# Altium PCB DSP6748_F.PcbDoc (part 12 of 16)
Units mil, origin at the board's own origin, x right, y up, seen from the top; angles counter-clockwise.
Board outline 8188.98 x 4055.12 mil, 4 copper layers (Top Layer, GND, VCC, Bottom Layer); 409 components, 262 nets, 1424 pads, 350 vias.
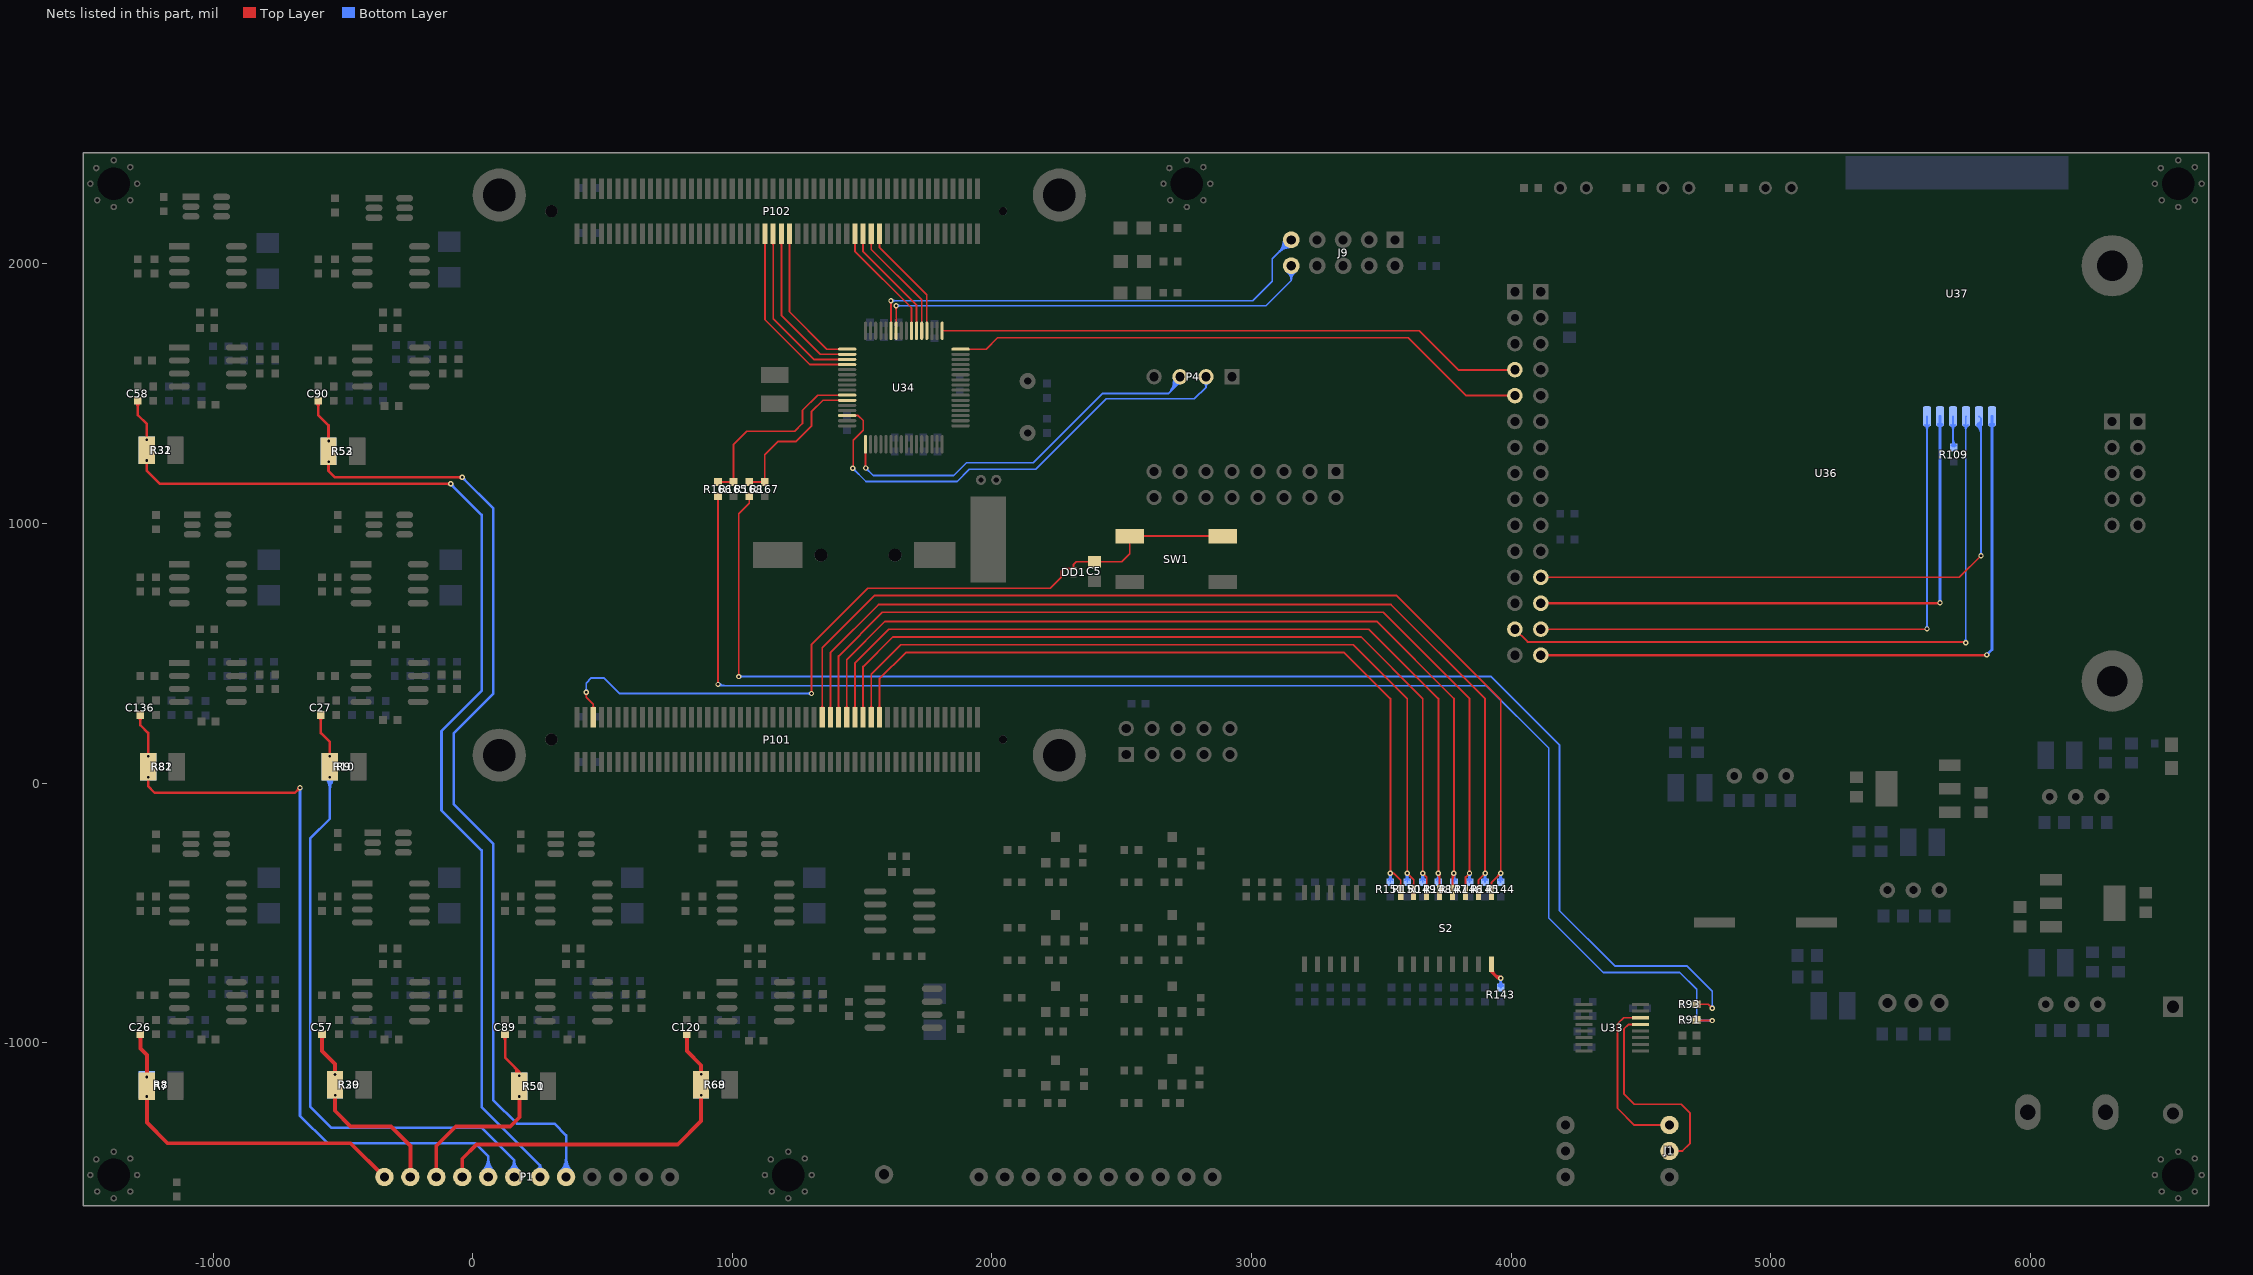
[diagram p14: the nets of this part, all layers, seen from the top]

## Via types
v1: diameter 21, hole 10, Top Layer to Bottom Layer, 244 vias
v2: diameter 20, hole 10, Top Layer to Bottom Layer, 84 vias
v3: diameter 32, hole 16, Top Layer to Bottom Layer, 11 vias
v4: diameter 24, hole 12, Top Layer to Bottom Layer, 7 vias
v5: diameter 39.37, hole 19.68, Top Layer to Bottom Layer, 3 vias
v6: diameter 30, hole 15, Top Layer to Bottom Layer, 1 vias

## Nets (pads, with @x,y where several pads share a name; then routed paths per layer and width w, separated by ;. In a path a pad name is that pad's centre, name@x,y a point inside that pad or via, vN(x,y) a via of type N, cw(c..) or ccw(c..) an arc to the next point about the centre after c; other vN are vias at no path point) (continued)
NetR143_2: R143.2 S2.8 | length 579.7
  Top Layer w10: S2.8@3924.81,-697.48 3924.81,-727.48 ; v1(3959.81,-752.48) 3949.81,-752.48 3924.81,-727.48 ; S2.8@3921.72,-720.89 cw(c3916.25,-727.48) 3924.81,-727.48 ; S2.8@3921.72,-720.89 cw(c3916.25,-727.48) 3924.81,-727.48 ; S2.8@3921.72,-720.89 cw(c3916.25,-727.48) 3924.81,-727.48 ; S2.8@3921.72,-720.89 cw(c3916.25,-727.48) 3924.81,-727.48 ; S2.8@3921.72,-720.89 cw(c3916.25,-727.48) 3924.81,-727.48 ; 3924.81,-727.48 cw(c3933.37,-727.48) S2.8@3927.9,-720.89 ; 3924.81,-727.48 cw(c3933.37,-727.48) S2.8@3927.9,-720.89 ; 3924.81,-727.48 cw(c3933.37,-727.48) S2.8@3927.9,-720.89 ; 3924.81,-727.48 cw(c3933.37,-727.48) S2.8@3927.9,-720.89 ; 3924.81,-727.48 cw(c3933.37,-727.48) S2.8@3927.9,-720.89 ; S2.8@3929.65,-717.17 ccw(c3966.25,-717.17) 3940.37,-743.04 ; S2.8@3929.65,-717.17 ccw(c3966.25,-717.17) 3940.37,-743.04 ; S2.8@3929.65,-717.17 ccw(c3966.25,-717.17) 3940.37,-743.04 ; 3933.35,-736.02 ccw(c3959.81,-709.56) v1@3959.81,-746.98 ; 3933.35,-736.02 ccw(c3959.81,-709.56) v1@3959.81,-746.98 ; 3933.35,-736.02 ccw(c3959.81,-709.56) v1@3959.81,-746.98 ; S2.8@3922.39,-721.36 cw(c3908.56,-745.31) 3935.28,-738.15 ccw(c3908.56,-745.31) S2.8@3922.39,-721.36
  Bottom Layer w10: R143.2@3959.81,-787.48 v1(3959.81,-752.48) ; R143.2@3952.74,-780.41 ccw(c3935.67,-763.34) 3959.81,-763.34 ; R143.2@3952.74,-780.41 ccw(c3935.67,-763.34) 3959.81,-763.34 ; R143.2@3952.74,-780.41 ccw(c3935.67,-763.34) 3959.81,-763.34 ; v1@3955.92,-756.37 cw(c3946.53,-765.76) 3959.81,-765.76 ; v1@3955.92,-756.37 cw(c3946.53,-765.76) 3959.81,-765.76 ; v1@3955.92,-756.37 cw(c3946.53,-765.76) 3959.81,-765.76 ; 3959.81,-765.76 cw(c3973.09,-765.76) v1@3963.7,-756.37 ; 3959.81,-765.76 cw(c3973.09,-765.76) v1@3963.7,-756.37 ; 3959.81,-765.76 cw(c3973.09,-765.76) v1@3963.7,-756.37 ; 3959.81,-763.34 ccw(c3983.95,-763.34) R143.2@3966.88,-780.41 ; 3959.81,-763.34 ccw(c3983.95,-763.34) R143.2@3966.88,-780.41 ; 3959.81,-763.34 ccw(c3983.95,-763.34) R143.2@3966.88,-780.41
NUM0: P101.76 R151.2 S2.16 | length 3497
  Top Layer w7: P101.76@1562.44,288.14 ccw(c1551.61,298.97) 1566.93,298.97 ccw(c1582.25,298.97) P101.76@1571.42,288.14 ; P101.76@1566.93,254.13 1566.93,401.3 1668.15,502.52 3357.48,502.52 3535,325 v1@3535,-347.48 ; v1(3534.81,-347.48) 3547.81,-347.48 ; v1@3540.65,-351.33 cw(c3547.81,-356.05) 3547.81,-347.48 ; v1@3540.65,-343.63 ccw(c3547.81,-338.91) 3547.81,-347.48 ; S2.16@3574.81,-421.89 3574.81,-374.48 3547.81,-347.48 ; S2.16@3570.32,-397.72 ccw(c3559.5,-386.89) 3574.81,-386.89 ; S2.16@3570.32,-397.72 ccw(c3559.5,-386.89) 3574.81,-386.89 ; S2.16@3570.32,-397.72 ccw(c3559.5,-386.89) 3574.81,-386.89 ; 3574.81,-386.89 ccw(c3590.12,-386.89) S2.16@3579.29,-397.72 ; 3574.81,-386.89 ccw(c3590.12,-386.89) S2.16@3579.29,-397.72 ; 3574.81,-386.89 ccw(c3590.12,-386.89) S2.16@3579.29,-397.72
  Bottom Layer w7: R151.2@3534.81,-382.48 v1(3534.81,-347.48) ; R151.2@3526.68,-374.35 ccw(c3507.05,-354.72) v1@3534.81,-354.72 ; R151.2@3526.68,-374.35 ccw(c3507.05,-354.72) v1@3534.81,-354.72 ; R151.2@3526.68,-374.35 ccw(c3507.05,-354.72) v1@3534.81,-354.72 ; v1@3529.23,-351.71 cw(c3516.54,-361.34) 3531.93,-365.46 ; v1@3529.23,-351.71 cw(c3516.54,-361.34) 3531.93,-365.46 ; v1@3529.23,-351.71 cw(c3516.54,-361.34) 3531.93,-365.46 ; v1@3529.86,-352.43 cw(c3517.91,-364.38) 3534.81,-364.38 ; v1@3529.86,-352.43 cw(c3517.91,-364.38) 3534.81,-364.38 ; v1@3529.86,-352.43 cw(c3517.91,-364.38) 3534.81,-364.38 ; v1@3531.31,-353.54 cw(c3526.06,-362.64) 3536.2,-359.92 ; v1@3531.31,-353.54 cw(c3526.06,-362.64) 3536.2,-359.92 ; v1@3531.31,-353.54 cw(c3526.06,-362.64) 3536.2,-359.92 ; 3533.42,-359.92 cw(c3543.56,-362.64) v1@3538.31,-353.54 ; 3533.42,-359.92 cw(c3543.56,-362.64) v1@3538.31,-353.54 ; 3533.42,-359.92 cw(c3543.56,-362.64) v1@3538.31,-353.54 ; 3534.81,-364.38 cw(c3551.71,-364.38) v1@3539.76,-352.43 ; 3534.81,-364.38 cw(c3551.71,-364.38) v1@3539.76,-352.43 ; 3534.81,-364.38 cw(c3551.71,-364.38) v1@3539.76,-352.43 ; v1@3534.81,-354.72 ccw(c3562.57,-354.72) R151.2@3542.94,-374.35 ; v1@3534.81,-354.72 ccw(c3562.57,-354.72) R151.2@3542.94,-374.35 ; v1@3534.81,-354.72 ccw(c3562.57,-354.72) R151.2@3542.94,-374.35 ; 3537.69,-365.46 cw(c3553.08,-361.34) v1@3540.39,-351.71 ; 3537.69,-365.46 cw(c3553.08,-361.34) v1@3540.39,-351.71 ; 3537.69,-365.46 cw(c3553.08,-361.34) v1@3540.39,-351.71
NUM1: P101.74 R150.2 S2.15 | length 3598.4
  Top Layer w7: P101.74@1530.94,288.14 ccw(c1520.11,298.97) 1535.43,298.97 ccw(c1550.75,298.97) P101.74@1539.92,288.14 ; P101.74@1535.43,254.13 1535.43,419.8 1648.15,532.52 3392.48,532.52 3600,325 v1@3600,-347.48 ; v1(3599.81,-347.48) 3624.81,-372.48 S2.15@3624.81,-421.89 ; S2.15@3620.32,-397.72 ccw(c3609.5,-386.89) 3624.81,-386.89 ; S2.15@3620.32,-397.72 ccw(c3609.5,-386.89) 3624.81,-386.89 ; S2.15@3620.32,-397.72 ccw(c3609.5,-386.89) 3624.81,-386.89 ; 3624.81,-386.89 ccw(c3640.12,-386.89) S2.15@3629.29,-397.72 ; 3624.81,-386.89 ccw(c3640.12,-386.89) S2.15@3629.29,-397.72 ; 3624.81,-386.89 ccw(c3640.12,-386.89) S2.15@3629.29,-397.72
  Bottom Layer w7: R150.2@3599.81,-382.48 v1(3599.81,-347.48) ; R150.2@3591.68,-374.35 ccw(c3572.05,-354.72) v1@3599.81,-354.72 ; R150.2@3591.68,-374.35 ccw(c3572.05,-354.72) v1@3599.81,-354.72 ; R150.2@3591.68,-374.35 ccw(c3572.05,-354.72) v1@3599.81,-354.72 ; v1@3594.23,-351.71 cw(c3581.54,-361.34) 3596.93,-365.46 ; v1@3594.23,-351.71 cw(c3581.54,-361.34) 3596.93,-365.46 ; v1@3594.23,-351.71 cw(c3581.54,-361.34) 3596.93,-365.46 ; v1@3594.86,-352.43 cw(c3582.91,-364.38) 3599.81,-364.38 ; v1@3594.86,-352.43 cw(c3582.91,-364.38) 3599.81,-364.38 ; v1@3594.86,-352.43 cw(c3582.91,-364.38) 3599.81,-364.38 ; v1@3596.31,-353.54 cw(c3591.06,-362.64) 3601.2,-359.92 ; v1@3596.31,-353.54 cw(c3591.06,-362.64) 3601.2,-359.92 ; v1@3596.31,-353.54 cw(c3591.06,-362.64) 3601.2,-359.92 ; 3598.42,-359.92 cw(c3608.56,-362.64) v1@3603.31,-353.54 ; 3598.42,-359.92 cw(c3608.56,-362.64) v1@3603.31,-353.54 ; 3598.42,-359.92 cw(c3608.56,-362.64) v1@3603.31,-353.54 ; 3599.81,-364.38 cw(c3616.71,-364.38) v1@3604.76,-352.43 ; 3599.81,-364.38 cw(c3616.71,-364.38) v1@3604.76,-352.43 ; 3599.81,-364.38 cw(c3616.71,-364.38) v1@3604.76,-352.43 ; v1@3599.81,-354.72 ccw(c3627.57,-354.72) R150.2@3607.94,-374.35 ; v1@3599.81,-354.72 ccw(c3627.57,-354.72) R150.2@3607.94,-374.35 ; v1@3599.81,-354.72 ccw(c3627.57,-354.72) R150.2@3607.94,-374.35 ; 3602.69,-365.46 cw(c3618.08,-361.34) v1@3605.39,-351.71 ; 3602.69,-365.46 cw(c3618.08,-361.34) v1@3605.39,-351.71 ; 3602.69,-365.46 cw(c3618.08,-361.34) v1@3605.39,-351.71
NUM2: P101.72 R149.2 S2.14 | length 3727.3
  Top Layer w7: P101.72@1499.45,288.14 ccw(c1488.62,298.97) 1503.94,298.97 ccw(c1519.26,298.97) P101.72@1508.43,288.14 ; P101.72@1503.94,254.13 1503.94,448.31 1618.15,562.52 3422.48,562.52 3660,325 v1@3660,-347.48 ; v1(3659.81,-347.48) 3674.81,-362.48 S2.14@3674.81,-421.89 ; S2.14@3670.32,-397.72 ccw(c3659.5,-386.89) 3674.81,-386.89 ; S2.14@3670.32,-397.72 ccw(c3659.5,-386.89) 3674.81,-386.89 ; S2.14@3670.32,-397.72 ccw(c3659.5,-386.89) 3674.81,-386.89 ; 3674.81,-386.89 ccw(c3690.12,-386.89) S2.14@3679.29,-397.72 ; 3674.81,-386.89 ccw(c3690.12,-386.89) S2.14@3679.29,-397.72 ; 3674.81,-386.89 ccw(c3690.12,-386.89) S2.14@3679.29,-397.72
  Bottom Layer w7: R149.2@3659.81,-382.48 v1(3659.81,-347.48) ; R149.2@3651.68,-374.35 ccw(c3632.05,-354.72) v1@3659.81,-354.72 ; R149.2@3651.68,-374.35 ccw(c3632.05,-354.72) v1@3659.81,-354.72 ; R149.2@3651.68,-374.35 ccw(c3632.05,-354.72) v1@3659.81,-354.72 ; v1@3654.23,-351.71 cw(c3641.54,-361.34) 3656.93,-365.46 ; v1@3654.23,-351.71 cw(c3641.54,-361.34) 3656.93,-365.46 ; v1@3654.23,-351.71 cw(c3641.54,-361.34) 3656.93,-365.46 ; v1@3654.86,-352.43 cw(c3642.91,-364.38) 3659.81,-364.38 ; v1@3654.86,-352.43 cw(c3642.91,-364.38) 3659.81,-364.38 ; v1@3654.86,-352.43 cw(c3642.91,-364.38) 3659.81,-364.38 ; v1@3656.31,-353.54 cw(c3651.06,-362.64) 3661.2,-359.92 ; v1@3656.31,-353.54 cw(c3651.06,-362.64) 3661.2,-359.92 ; v1@3656.31,-353.54 cw(c3651.06,-362.64) 3661.2,-359.92 ; 3658.42,-359.92 cw(c3668.56,-362.64) v1@3663.31,-353.54 ; 3658.42,-359.92 cw(c3668.56,-362.64) v1@3663.31,-353.54 ; 3658.42,-359.92 cw(c3668.56,-362.64) v1@3663.31,-353.54 ; 3659.81,-364.38 cw(c3676.71,-364.38) v1@3664.76,-352.43 ; 3659.81,-364.38 cw(c3676.71,-364.38) v1@3664.76,-352.43 ; 3659.81,-364.38 cw(c3676.71,-364.38) v1@3664.76,-352.43 ; v1@3659.81,-354.72 ccw(c3687.57,-354.72) R149.2@3667.94,-374.35 ; v1@3659.81,-354.72 ccw(c3687.57,-354.72) R149.2@3667.94,-374.35 ; v1@3659.81,-354.72 ccw(c3687.57,-354.72) R149.2@3667.94,-374.35 ; 3662.69,-365.46 cw(c3678.08,-361.34) v1@3665.39,-351.71 ; 3662.69,-365.46 cw(c3678.08,-361.34) v1@3665.39,-351.71 ; 3662.69,-365.46 cw(c3678.08,-361.34) v1@3665.39,-351.71
NUM3: P101.70 R148.2 S2.13 | length 3967.7
  Top Layer w7: P101.70@1467.95,288.14 ccw(c1457.12,298.97) 1472.44,298.97 ccw(c1487.76,298.97) P101.70@1476.93,288.14 ; P101.70@1472.44,254.13 1472.44,461.81 1603.15,592.52 3452.48,592.52 3720,325 v1@3720,-347.48 ; S2.13@3724.81,-421.89 3724.81,-352.48 v1(3719.81,-347.48) ; v1@3714.86,-352.43 cw(c3690.84,-376.45) 3724.81,-376.45 ; v1@3714.86,-352.43 cw(c3690.84,-376.45) 3724.81,-376.45 ; v1@3714.86,-352.43 cw(c3690.84,-376.45) 3724.81,-376.45 ; v1(3719.81,-347.48) cw(c3707.74,-359.55) 3724.81,-359.55 ; v1(3719.81,-347.48) cw(c3707.74,-359.55) 3724.81,-359.55 ; v1(3719.81,-347.48) cw(c3707.74,-359.55) 3724.81,-359.55 ; S2.13@3720.32,-397.72 ccw(c3709.5,-386.89) 3724.81,-386.89 ; S2.13@3720.32,-397.72 ccw(c3709.5,-386.89) 3724.81,-386.89 ; S2.13@3720.32,-397.72 ccw(c3709.5,-386.89) 3724.81,-386.89 ; 3724.81,-386.89 ccw(c3740.12,-386.89) S2.13@3729.29,-397.72 ; 3724.81,-386.89 ccw(c3740.12,-386.89) S2.13@3729.29,-397.72 ; 3724.81,-386.89 ccw(c3740.12,-386.89) S2.13@3729.29,-397.72
  Bottom Layer w7: R148.2@3719.81,-382.48 v1(3719.81,-347.48) ; R148.2@3711.68,-374.35 ccw(c3692.05,-354.72) v1@3719.81,-354.72 ; R148.2@3711.68,-374.35 ccw(c3692.05,-354.72) v1@3719.81,-354.72 ; R148.2@3711.68,-374.35 ccw(c3692.05,-354.72) v1@3719.81,-354.72 ; v1@3714.23,-351.71 cw(c3701.54,-361.34) 3716.93,-365.46 ; v1@3714.23,-351.71 cw(c3701.54,-361.34) 3716.93,-365.46 ; v1@3714.23,-351.71 cw(c3701.54,-361.34) 3716.93,-365.46 ; v1@3714.86,-352.43 cw(c3702.91,-364.38) 3719.81,-364.38 ; v1@3714.86,-352.43 cw(c3702.91,-364.38) 3719.81,-364.38 ; v1@3714.86,-352.43 cw(c3702.91,-364.38) 3719.81,-364.38 ; v1@3716.31,-353.54 cw(c3711.06,-362.64) 3721.2,-359.92 ; v1@3716.31,-353.54 cw(c3711.06,-362.64) 3721.2,-359.92 ; v1@3716.31,-353.54 cw(c3711.06,-362.64) 3721.2,-359.92 ; 3718.42,-359.92 cw(c3728.56,-362.64) v1@3723.31,-353.54 ; 3718.42,-359.92 cw(c3728.56,-362.64) v1@3723.31,-353.54 ; 3718.42,-359.92 cw(c3728.56,-362.64) v1@3723.31,-353.54 ; 3719.81,-364.38 cw(c3736.71,-364.38) v1@3724.76,-352.43 ; 3719.81,-364.38 cw(c3736.71,-364.38) v1@3724.76,-352.43 ; 3719.81,-364.38 cw(c3736.71,-364.38) v1@3724.76,-352.43 ; v1@3719.81,-354.72 ccw(c3747.57,-354.72) R148.2@3727.94,-374.35 ; v1@3719.81,-354.72 ccw(c3747.57,-354.72) R148.2@3727.94,-374.35 ; v1@3719.81,-354.72 ccw(c3747.57,-354.72) R148.2@3727.94,-374.35 ; 3722.69,-365.46 cw(c3738.08,-361.34) v1@3725.39,-351.71 ; 3722.69,-365.46 cw(c3738.08,-361.34) v1@3725.39,-351.71 ; 3722.69,-365.46 cw(c3738.08,-361.34) v1@3725.39,-351.71
NUM4: P101.68 R147.2 S2.12 | length 4091.9
  Top Layer w7: P101.68@1436.46,288.14 ccw(c1425.63,298.97) 1440.95,298.97 ccw(c1456.27,298.97) P101.68@1445.44,288.14 ; P101.68@1440.95,254.13 1440.95,475.32 1588.15,622.52 3482.48,622.52 3780,325 v1@3780,-347.48 ; S2.12@3774.81,-421.89 3774.81,-352.48 v1(3779.81,-347.48) ; S2.12@3770.32,-397.72 ccw(c3759.5,-386.89) 3774.81,-386.89 ; S2.12@3770.32,-397.72 ccw(c3759.5,-386.89) 3774.81,-386.89 ; S2.12@3770.32,-397.72 ccw(c3759.5,-386.89) 3774.81,-386.89 ; 3774.81,-386.89 ccw(c3790.12,-386.89) S2.12@3779.29,-397.72 ; 3774.81,-386.89 ccw(c3790.12,-386.89) S2.12@3779.29,-397.72 ; 3774.81,-386.89 ccw(c3790.12,-386.89) S2.12@3779.29,-397.72 ; 3774.81,-376.45 cw(c3808.78,-376.45) v1@3784.76,-352.43 ; 3774.81,-376.45 cw(c3808.78,-376.45) v1@3784.76,-352.43 ; 3774.81,-376.45 cw(c3808.78,-376.45) v1@3784.76,-352.43 ; 3774.81,-359.55 cw(c3791.88,-359.55) v1(3779.81,-347.48) ; 3774.81,-359.55 cw(c3791.88,-359.55) v1(3779.81,-347.48) ; 3774.81,-359.55 cw(c3791.88,-359.55) v1(3779.81,-347.48)
  Bottom Layer w7: R147.2@3779.81,-382.48 v1(3779.81,-347.48) ; R147.2@3771.68,-374.35 ccw(c3752.05,-354.72) v1@3779.81,-354.72 ; R147.2@3771.68,-374.35 ccw(c3752.05,-354.72) v1@3779.81,-354.72 ; R147.2@3771.68,-374.35 ccw(c3752.05,-354.72) v1@3779.81,-354.72 ; v1@3774.23,-351.71 cw(c3761.54,-361.34) 3776.93,-365.46 ; v1@3774.23,-351.71 cw(c3761.54,-361.34) 3776.93,-365.46 ; v1@3774.23,-351.71 cw(c3761.54,-361.34) 3776.93,-365.46 ; v1@3774.86,-352.43 cw(c3762.91,-364.38) 3779.81,-364.38 ; v1@3774.86,-352.43 cw(c3762.91,-364.38) 3779.81,-364.38 ; v1@3774.86,-352.43 cw(c3762.91,-364.38) 3779.81,-364.38 ; v1@3776.31,-353.54 cw(c3771.06,-362.64) 3781.2,-359.92 ; v1@3776.31,-353.54 cw(c3771.06,-362.64) 3781.2,-359.92 ; v1@3776.31,-353.54 cw(c3771.06,-362.64) 3781.2,-359.92 ; 3778.42,-359.92 cw(c3788.56,-362.64) v1@3783.31,-353.54 ; 3778.42,-359.92 cw(c3788.56,-362.64) v1@3783.31,-353.54 ; 3778.42,-359.92 cw(c3788.56,-362.64) v1@3783.31,-353.54 ; 3779.81,-364.38 cw(c3796.71,-364.38) v1@3784.76,-352.43 ; 3779.81,-364.38 cw(c3796.71,-364.38) v1@3784.76,-352.43 ; 3779.81,-364.38 cw(c3796.71,-364.38) v1@3784.76,-352.43 ; v1@3779.81,-354.72 ccw(c3807.57,-354.72) R147.2@3787.94,-374.35 ; v1@3779.81,-354.72 ccw(c3807.57,-354.72) R147.2@3787.94,-374.35 ; v1@3779.81,-354.72 ccw(c3807.57,-354.72) R147.2@3787.94,-374.35 ; 3782.69,-365.46 cw(c3798.08,-361.34) v1@3785.39,-351.71 ; 3782.69,-365.46 cw(c3798.08,-361.34) v1@3785.39,-351.71 ; 3782.69,-365.46 cw(c3798.08,-361.34) v1@3785.39,-351.71
NUM5: P101.66 R146.2 S2.11 | length 4104.2
  Top Layer w7: P101.66@1404.96,288.14 ccw(c1394.13,298.97) 1409.45,298.97 ccw(c1424.77,298.97) P101.66@1413.94,288.14 ; P101.66@1409.45,254.13 1409.45,488.82 1578.15,657.52 3507.48,657.52 3840,325 v1@3840,-347.48 ; S2.11@3824.81,-421.89 3824.81,-362.48 v1(3839.81,-347.48) ; S2.11@3820.32,-397.72 ccw(c3809.5,-386.89) 3824.81,-386.89 ; S2.11@3820.32,-397.72 ccw(c3809.5,-386.89) 3824.81,-386.89 ; S2.11@3820.32,-397.72 ccw(c3809.5,-386.89) 3824.81,-386.89 ; 3824.81,-386.89 ccw(c3840.12,-386.89) S2.11@3829.29,-397.72 ; 3824.81,-386.89 ccw(c3840.12,-386.89) S2.11@3829.29,-397.72 ; 3824.81,-386.89 ccw(c3840.12,-386.89) S2.11@3829.29,-397.72
  Bottom Layer w7: R146.2@3839.81,-382.48 v1(3839.81,-347.48) ; R146.2@3831.68,-374.35 ccw(c3812.05,-354.72) v1@3839.81,-354.72 ; R146.2@3831.68,-374.35 ccw(c3812.05,-354.72) v1@3839.81,-354.72 ; R146.2@3831.68,-374.35 ccw(c3812.05,-354.72) v1@3839.81,-354.72 ; v1@3834.23,-351.71 cw(c3821.54,-361.34) 3836.93,-365.46 ; v1@3834.23,-351.71 cw(c3821.54,-361.34) 3836.93,-365.46 ; v1@3834.23,-351.71 cw(c3821.54,-361.34) 3836.93,-365.46 ; v1@3834.86,-352.43 cw(c3822.91,-364.38) 3839.81,-364.38 ; v1@3834.86,-352.43 cw(c3822.91,-364.38) 3839.81,-364.38 ; v1@3834.86,-352.43 cw(c3822.91,-364.38) 3839.81,-364.38 ; v1@3836.31,-353.54 cw(c3831.06,-362.64) 3841.2,-359.92 ; v1@3836.31,-353.54 cw(c3831.06,-362.64) 3841.2,-359.92 ; v1@3836.31,-353.54 cw(c3831.06,-362.64) 3841.2,-359.92 ; 3838.42,-359.92 cw(c3848.56,-362.64) v1@3843.31,-353.54 ; 3838.42,-359.92 cw(c3848.56,-362.64) v1@3843.31,-353.54 ; 3838.42,-359.92 cw(c3848.56,-362.64) v1@3843.31,-353.54 ; 3839.81,-364.38 cw(c3856.71,-364.38) v1@3844.76,-352.43 ; 3839.81,-364.38 cw(c3856.71,-364.38) v1@3844.76,-352.43 ; 3839.81,-364.38 cw(c3856.71,-364.38) v1@3844.76,-352.43 ; v1@3839.81,-354.72 ccw(c3867.57,-354.72) R146.2@3847.94,-374.35 ; v1@3839.81,-354.72 ccw(c3867.57,-354.72) R146.2@3847.94,-374.35 ; v1@3839.81,-354.72 ccw(c3867.57,-354.72) R146.2@3847.94,-374.35 ; 3842.69,-365.46 cw(c3858.08,-361.34) v1@3845.39,-351.71 ; 3842.69,-365.46 cw(c3858.08,-361.34) v1@3845.39,-351.71 ; 3842.69,-365.46 cw(c3858.08,-361.34) v1@3845.39,-351.71
NUM6: P101.64 R145.2 S2.10 | length 4232.6
  Top Layer w7: P101.64@1373.46,288.14 ccw(c1362.63,298.97) 1377.95,298.97 ccw(c1393.27,298.97) P101.64@1382.44,288.14 ; P101.64@1377.95,254.13 1377.95,502.32 1563.15,687.52 3537.48,687.52 3900,325 v1@3900,-347.48 ; S2.10@3874.81,-421.89 3874.81,-372.48 v1(3899.81,-347.48) ; S2.10@3870.32,-397.72 ccw(c3859.5,-386.89) 3874.81,-386.89 ; S2.10@3870.32,-397.72 ccw(c3859.5,-386.89) 3874.81,-386.89 ; S2.10@3870.32,-397.72 ccw(c3859.5,-386.89) 3874.81,-386.89 ; 3874.81,-386.89 ccw(c3890.12,-386.89) S2.10@3879.29,-397.72 ; 3874.81,-386.89 ccw(c3890.12,-386.89) S2.10@3879.29,-397.72 ; 3874.81,-386.89 ccw(c3890.12,-386.89) S2.10@3879.29,-397.72
  Bottom Layer w7: R145.2@3899.81,-382.48 v1(3899.81,-347.48) ; R145.2@3891.68,-374.35 ccw(c3872.05,-354.72) v1@3899.81,-354.72 ; R145.2@3891.68,-374.35 ccw(c3872.05,-354.72) v1@3899.81,-354.72 ; R145.2@3891.68,-374.35 ccw(c3872.05,-354.72) v1@3899.81,-354.72 ; v1@3894.23,-351.71 cw(c3881.54,-361.34) 3896.93,-365.46 ; v1@3894.23,-351.71 cw(c3881.54,-361.34) 3896.93,-365.46 ; v1@3894.23,-351.71 cw(c3881.54,-361.34) 3896.93,-365.46 ; v1@3894.86,-352.43 cw(c3882.91,-364.38) 3899.81,-364.38 ; v1@3894.86,-352.43 cw(c3882.91,-364.38) 3899.81,-364.38 ; v1@3894.86,-352.43 cw(c3882.91,-364.38) 3899.81,-364.38 ; v1@3896.31,-353.54 cw(c3891.06,-362.64) 3901.2,-359.92 ; v1@3896.31,-353.54 cw(c3891.06,-362.64) 3901.2,-359.92 ; v1@3896.31,-353.54 cw(c3891.06,-362.64) 3901.2,-359.92 ; 3898.42,-359.92 cw(c3908.56,-362.64) v1@3903.31,-353.54 ; 3898.42,-359.92 cw(c3908.56,-362.64) v1@3903.31,-353.54 ; 3898.42,-359.92 cw(c3908.56,-362.64) v1@3903.31,-353.54 ; 3899.81,-364.38 cw(c3916.71,-364.38) v1@3904.76,-352.43 ; 3899.81,-364.38 cw(c3916.71,-364.38) v1@3904.76,-352.43 ; 3899.81,-364.38 cw(c3916.71,-364.38) v1@3904.76,-352.43 ; v1@3899.81,-354.72 ccw(c3927.57,-354.72) R145.2@3907.94,-374.35 ; v1@3899.81,-354.72 ccw(c3927.57,-354.72) R145.2@3907.94,-374.35 ; v1@3899.81,-354.72 ccw(c3927.57,-354.72) R145.2@3907.94,-374.35 ; 3902.69,-365.46 cw(c3918.08,-361.34) v1@3905.39,-351.71 ; 3902.69,-365.46 cw(c3918.08,-361.34) v1@3905.39,-351.71 ; 3902.69,-365.46 cw(c3918.08,-361.34) v1@3905.39,-351.71
NUM7: P101.62 R144.2 S2.9 | length 4499
  Top Layer w7: P101.62@1341.97,288.14 ccw(c1331.14,298.97) 1346.46,298.97 ccw(c1361.78,298.97) P101.62@1350.95,288.14 ; P101.62@1346.46,254.13 1346.46,520.83 1548.15,722.52 3557.48,722.52 3960,320 v1@3960,-347.48 ; S2.9@3924.81,-421.89 3924.81,-382.48 v1(3959.81,-347.48) ; S2.9@3920.32,-397.72 ccw(c3909.5,-386.89) 3924.81,-386.89 ; S2.9@3920.32,-397.72 ccw(c3909.5,-386.89) 3924.81,-386.89 ; S2.9@3920.32,-397.72 ccw(c3909.5,-386.89) 3924.81,-386.89 ; 3924.81,-386.89 ccw(c3940.12,-386.89) S2.9@3929.29,-397.72 ; 3924.81,-386.89 ccw(c3940.12,-386.89) S2.9@3929.29,-397.72 ; 3924.81,-386.89 ccw(c3940.12,-386.89) S2.9@3929.29,-397.72 ; 3947.86,-359.43 cw(c3959.81,-371.38) v1@3959.81,-354.48 ; 3947.86,-359.43 ccw(c3935.91,-347.48) v1@3952.81,-347.48 ; 3947.86,-359.43 cw(c3959.81,-371.38) v1@3959.81,-354.48 ; 3947.86,-359.43 ccw(c3935.91,-347.48) v1@3952.81,-347.48 ; 3947.86,-359.43 ccw(c3935.91,-347.48) v1@3952.81,-347.48 ; 3947.86,-359.43 cw(c3959.81,-371.38) v1@3959.81,-354.48 ; v1(3959.81,-347.48) cw(c3947.82,-345.03) 3950.99,-356.84 ccw(c3947.82,-345.03) v1(3959.81,-347.48) ; v1(3959.81,-347.48) ccw(c3962.26,-359.47) 3950.45,-356.3 cw(c3962.26,-359.47) v1(3959.81,-347.48)
  Bottom Layer w7: R144.2@3959.81,-382.48 v1(3959.81,-347.48) ; R144.2@3951.68,-374.35 ccw(c3932.05,-354.72) v1@3959.81,-354.72 ; R144.2@3951.68,-374.35 ccw(c3932.05,-354.72) v1@3959.81,-354.72 ; R144.2@3951.68,-374.35 ccw(c3932.05,-354.72) v1@3959.81,-354.72 ; v1@3954.23,-351.71 cw(c3941.54,-361.34) 3956.93,-365.46 ; v1@3954.23,-351.71 cw(c3941.54,-361.34) 3956.93,-365.46 ; v1@3954.23,-351.71 cw(c3941.54,-361.34) 3956.93,-365.46 ; v1@3954.86,-352.43 cw(c3942.91,-364.38) 3959.81,-364.38 ; v1@3954.86,-352.43 cw(c3942.91,-364.38) 3959.81,-364.38 ; v1@3954.86,-352.43 cw(c3942.91,-364.38) 3959.81,-364.38 ; v1@3956.31,-353.54 cw(c3951.06,-362.64) 3961.2,-359.92 ; v1@3956.31,-353.54 cw(c3951.06,-362.64) 3961.2,-359.92 ; v1@3956.31,-353.54 cw(c3951.06,-362.64) 3961.2,-359.92 ; 3958.42,-359.92 cw(c3968.56,-362.64) v1@3963.31,-353.54 ; 3958.42,-359.92 cw(c3968.56,-362.64) v1@3963.31,-353.54 ; 3958.42,-359.92 cw(c3968.56,-362.64) v1@3963.31,-353.54 ; 3959.81,-364.38 cw(c3976.71,-364.38) v1@3964.76,-352.43 ; 3959.81,-364.38 cw(c3976.71,-364.38) v1@3964.76,-352.43 ; 3959.81,-364.38 cw(c3976.71,-364.38) v1@3964.76,-352.43 ; v1@3959.81,-354.72 ccw(c3987.57,-354.72) R144.2@3967.94,-374.35 ; v1@3959.81,-354.72 ccw(c3987.57,-354.72) R144.2@3967.94,-374.35 ; v1@3959.81,-354.72 ccw(c3987.57,-354.72) R144.2@3967.94,-374.35 ; 3962.69,-365.46 cw(c3978.08,-361.34) v1@3965.39,-351.71 ; 3962.69,-365.46 cw(c3978.08,-361.34) v1@3965.39,-351.71 ; 3962.69,-365.46 cw(c3978.08,-361.34) v1@3965.39,-351.71
PC_RX: R93.1 R168.1 | length 5518.4
  Top Layer w7: v2(1025,410) 1025,1037.58 1065,1077.58 R168.1@1065,1105 ; R93.1@4714.81,-852.48 4759.81,-852.48 v2(4774.81,-867.48)
  Bottom Layer w7: v2(1025,410) 3923.67,410 4186.15,147.52 4186.15,-491.15 4399.48,-704.48 4677.15,-704.48 4774.81,-802.14 v2(4774.81,-867.48) ; v2@1029.6,405.4 cw(c1040.69,394.31) 1040.69,410 cw(c1040.69,425.69) v2@1029.6,414.6 ; v2@4770.21,-862.88 ccw(c4759.12,-851.79) 4774.81,-851.79 ccw(c4790.5,-851.79) v2@4779.41,-862.88
PC_TX: R91.1 R166.1 | length 5658.4
  Top Layer w7: v2(945,380) R166.1@945,1105 ; R91.1@4714.81,-912.48 4717.33,-915 v2(4775,-915)
  Bottom Layer w7: v2@944.65,379.65 ccw(c955.86,390.86) 955.86,375 ; v2(945,380) 950,375 3905,375 4145,135 4145,-520 4355,-730 4650,-730 4715,-795 4715,-896.19 4733.81,-915 v2(4775,-915) ; v2@949.6,384.6 ccw(c972.76,407.76) 972.76,375 ; v2@4770.4,-919.6 ccw(c4759.31,-930.69) 4759.31,-915 ccw(c4759.31,-899.31) v2@4770.4,-910.4
SDCARD_BUSY: J9.9 U34.27 | length 2105
  Top Layer w7: v2@1606.55,1852.92 cw(c1594.38,1840.75) 1611.6,1840.75 ; v2(1611.15,1857.52) 1611.6,1857.07 U34.27@1611.6,1742.02 ; 1611.6,1842.91 cw(c1625.76,1842.91) v2@1615.75,1852.92
  Bottom Layer w7: v2(1611.15,1857.52) 1611.65,1858.02 3004.65,1858.02 3080.15,1933.52 3080.15,2019.52 J9.9@3153.15,2092.52 ; v2@1615.75,1852.92 cw(c1628.05,1840.62) 1628.05,1858.02 ; v2@1615.75,1862.12 ccw(c1625.63,1872.01) 1625.63,1858.02 ; J9.9@3124.15,2092.52 cw(c3054.14,2092.52) 3103.64,2043.01 cw(c3153.15,1993.51) J9.9@3153.15,2063.52 ; J9.9@3131.15,2092.52 cw(c3078.04,2092.52) 3115.59,2054.96 cw(c3153.15,2017.41) J9.9@3153.15,2070.52 ; J9.9@3138.15,2092.52 cw(c3101.94,2092.52) 3127.54,2066.91 cw(c3153.15,2041.31) J9.9@3153.15,2077.52
SDCARD_PWCTL: J9.10 U34.26 | length 1907.3
  Top Layer w7: v2@1626.55,1833.92 cw(c1615.14,1822.51) 1631.28,1822.51 ; v2(1631.15,1838.52) 1631.15,1840.25 1631.28,1840.39 U34.26@1631.28,1742.02 ; 1631.28,1823.15 cw(c1646.52,1823.15) v2@1635.75,1833.92
  Bottom Layer w7: v2@1629.15,1836.52 v2(1631.15,1838.52) 3055.81,1838.52 3153.15,1935.86 ; v2@1635.75,1833.92 cw(c1646.84,1822.83) 1646.84,1838.52 cw(c1646.84,1854.21) v2@1635.75,1843.12 ; J9.10@3136.19,1969 cw(c3112.3,1935.86) 3153.15,1935.86 ; J9.10@3140.28,1974.67 cw(c3122.16,1949.54) 3153.15,1949.54 cw(c3184.14,1949.54) J9.10@3166.02,1974.67 ; J9.10@3153.15,1992.52 3153.15,1935.86 ; J9.10@3170.11,1969 ccw(c3194,1935.86) 3153.15,1935.86
SIGNAL1: C26.1 P1.1 R7.2 R8.2 | length 1437.7
  Top Layer w15: C26.1@-1280.19,-967.48 -1280.19,-1022.48 -1255.31,-1047.36 R7.2@-1255.31,-1167.48 -1255.31,-1307.36 -1175.19,-1387.48 -470.19,-1387.48 P1.1@-340.19,-1517.48 ; C26.1@-1285.49,-972.78 cw(c-1298.3,-985.59) -1280.19,-985.59 ; C26.1@-1285.49,-972.78 cw(c-1298.3,-985.59) -1280.19,-985.59 ; C26.1@-1285.49,-972.78 cw(c-1298.3,-985.59) -1280.19,-985.59 ; -1280.19,-985.59 cw(c-1262.08,-985.59) C26.1@-1274.89,-972.78 ; -1280.19,-985.59 cw(c-1262.08,-985.59) C26.1@-1274.89,-972.78 ; -1280.19,-985.59 cw(c-1262.08,-985.59) C26.1@-1274.89,-972.78
  other v1: -1255.19,-1207.48 -1255.31,-1132.48
SIGNAL2: C57.1 P1.2 R29.2 R30.2 | length 867
  Top Layer w15: C57.1@-580.19,-967.48 -580.19,-1032.48 -530.31,-1082.36 R29.2@-530.31,-1162.48 -530.31,-1262.36 -470.19,-1322.48 -315.19,-1322.48 -240.19,-1397.48 P1.2@-240.19,-1517.48 ; C57.1@-585.49,-972.78 cw(c-598.3,-985.59) -580.19,-985.59 ; C57.1@-585.49,-972.78 cw(c-598.3,-985.59) -580.19,-985.59 ; C57.1@-585.49,-972.78 cw(c-598.3,-985.59) -580.19,-985.59 ; -580.19,-985.59 cw(c-562.08,-985.59) C57.1@-574.89,-972.78 ; -580.19,-985.59 cw(c-562.08,-985.59) C57.1@-574.89,-972.78 ; -580.19,-985.59 cw(c-562.08,-985.59) C57.1@-574.89,-972.78
  other v1: -530.19,-1202.48
  other v4: -530.19,-1122.48
SIGNAL3: C89.1 P1.3 R50.2 R51.2 | length 1452.8
  Top Layer w10: C89.1@124.81,-967.48 124.81,-1057.48 179.69,-1112.36 ; R50.2@175.92,-1123.59 ccw(c166.82,-1114.49) R50.2@179.69,-1114.49 ; R50.2@179.69,-1167.48 179.69,-1112.36 ; 179.69,-1113.92 ccw(c193.37,-1113.92) R50.2@183.7,-1123.59 ; C89.1@117.74,-974.55 cw(c100.67,-991.62) 124.81,-991.62 ; C89.1@117.74,-974.55 cw(c100.67,-991.62) 124.81,-991.62 ; C89.1@117.74,-974.55 cw(c100.67,-991.62) 124.81,-991.62 ; 124.81,-991.62 cw(c148.95,-991.62) C89.1@131.88,-974.55 ; 124.81,-991.62 cw(c148.95,-991.62) C89.1@131.88,-974.55 ; 124.81,-991.62 cw(c148.95,-991.62) C89.1@131.88,-974.55 ; 159.81,-1092.48 cw(c124.82,-1127.48) R50.2@174.31,-1127.48 ; 159.81,-1092.48 cw(c124.82,-1127.48) R50.2@174.31,-1127.48 ; 159.81,-1092.48 cw(c124.82,-1127.48) R50.2@174.31,-1127.48 ; 167.48,-1101.98 ccw(c192.02,-1095.4) 185.99,-1120.09 cw(c192.02,-1095.4) 167.48,-1101.98 ; 167.48,-1101.98 cw(c142.08,-1108.79) 160.81,-1127.23 ccw(c142.08,-1108.79) 167.48,-1101.98 ; R50.2@173.62,-1120.04 ccw(c171.81,-1112.36) 179.69,-1112.36 ; R50.2@173.62,-1120.04 ccw(c171.81,-1112.36) 179.69,-1112.36 ; R50.2@173.62,-1120.04 ccw(c171.81,-1112.36) 179.69,-1112.36 ; R50.2@175.92,-1131.37 cw(c166.82,-1140.47) R50.2@179.69,-1140.47 ; R50.2@175.92,-1131.37 cw(c166.82,-1140.47) R50.2@179.69,-1140.47 ; R50.2@175.92,-1131.37 cw(c166.82,-1140.47) R50.2@179.69,-1140.47 ; 176.88,-1109.56 cw(c158.96,-1127.48) R50.2@184.31,-1127.48 ; 176.88,-1109.56 cw(c158.96,-1127.48) R50.2@184.31,-1127.48 ; 176.88,-1109.56 cw(c158.96,-1127.48) R50.2@184.31,-1127.48 ; R50.2@179.69,-1141.04 cw(c193.37,-1141.04) R50.2@183.7,-1131.37 ; R50.2@179.69,-1141.04 cw(c193.37,-1141.04) R50.2@183.7,-1131.37 ; R50.2@179.69,-1141.04 cw(c193.37,-1141.04) R50.2@183.7,-1131.37 ; 179.69,-1112.36 ccw(c187.58,-1112.36) R50.2@185.77,-1120.04 ; 179.69,-1112.36 ccw(c187.58,-1112.36) R50.2@185.77,-1120.04 ; 179.69,-1112.36 ccw(c187.58,-1112.36) R50.2@185.77,-1120.04 ; 167.92,-1103.64 ccw(c198.27,-1095.51) 182.56,-1122.72 cw(c198.27,-1095.51) 167.92,-1103.64 ; R50.2@179.33,-1116.44 cw(c174.38,-1125.46) 184.03,-1129.05 ccw(c174.38,-1125.46) R50.2@179.33,-1116.44
  Top Layer w15: P1.3@-140.19,-1517.48 -140.19,-1397.48 -65.19,-1322.48 144.81,-1322.48 179.69,-1287.6 R50.2@179.69,-1167.48
  other v1: 179.81,-1207.48 179.81,-1127.48
SIGNAL4: C120.1 P1.4 R68.2 R69.2 | length 1493.1
  Top Layer w15: P1.4@-40.19,-1517.48 -40.19,-1447.48 14.81,-1392.48 789.81,-1392.48 879.69,-1302.6 R68.2@879.69,-1162.48 879.69,-1087.36 824.81,-1032.48 C120.1@824.81,-967.48 ; C120.1@819.51,-972.78 cw(c806.7,-985.59) 824.81,-985.59 ; C120.1@819.51,-972.78 cw(c806.7,-985.59) 824.81,-985.59 ; C120.1@819.51,-972.78 cw(c806.7,-985.59) 824.81,-985.59 ; 824.81,-985.59 cw(c842.92,-985.59) C120.1@830.11,-972.78 ; 824.81,-985.59 cw(c842.92,-985.59) C120.1@830.11,-972.78 ; 824.81,-985.59 cw(c842.92,-985.59) C120.1@830.11,-972.78
  other v1: 879.81,-1202.48 879.81,-1122.48
SIGNAL5: C136.1 P1.5 R81.2 R82.2 | length 3665.6
  Top Layer w10: C136.1@-1280.19,262.52 -1280.19,222.52 -1250.31,192.64 R81.2@-1250.31,62.52 -1250.31,-12.36 -1225.19,-37.48 -685.19,-37.48 v1(-665.19,-17.48) ; v1@-670.69,-17.48 cw(c-683.97,-17.48) -674.58,-26.87 cw(c-665.19,-36.26) v1@-665.19,-22.98 ; C136.1@-1287.26,255.45 cw(c-1304.33,238.38) -1280.19,238.38 ; C136.1@-1287.26,255.45 cw(c-1304.33,238.38) -1280.19,238.38 ; C136.1@-1287.26,255.45 cw(c-1304.33,238.38) -1280.19,238.38 ; -1280.19,238.38 cw(c-1256.05,238.38) C136.1@-1273.12,255.45 ; -1280.19,238.38 cw(c-1256.05,238.38) C136.1@-1273.12,255.45 ; -1280.19,238.38 cw(c-1256.05,238.38) C136.1@-1273.12,255.45 ; R81.2@-1254.08,18.63 cw(c-1263.18,9.53) R81.2@-1250.31,9.53 ; R81.2@-1254.08,18.63 cw(c-1263.18,9.53) R81.2@-1250.31,9.53 ; R81.2@-1254.08,18.63 cw(c-1263.18,9.53) R81.2@-1250.31,9.53 ; R81.2@-1254.08,26.41 ccw(c-1263.18,35.51) R81.2@-1250.31,35.51 ; R81.2@-1254.08,26.41 ccw(c-1263.18,35.51) R81.2@-1250.31,35.51 ; R81.2@-1254.08,26.41 ccw(c-1263.18,35.51) R81.2@-1250.31,35.51 ; R81.2@-1254.08,98.63 cw(c-1263.18,89.53) R81.2@-1250.31,89.53 ; R81.2@-1254.08,98.63 cw(c-1263.18,89.53) R81.2@-1250.31,89.53 ; R81.2@-1254.08,98.63 cw(c-1263.18,89.53) R81.2@-1250.31,89.53 ; R81.2@-1254.08,106.41 ccw(c-1263.18,115.51) R81.2@-1250.31,115.51 ; R81.2@-1254.08,106.41 ccw(c-1263.18,115.51) R81.2@-1250.31,115.51 ; R81.2@-1254.08,106.41 ccw(c-1263.18,115.51) R81.2@-1250.31,115.51 ; -1250.31,8.96 cw(c-1236.63,8.96) R81.2@-1246.3,18.63 ; -1250.31,8.96 cw(c-1236.63,8.96) R81.2@-1246.3,18.63 ; -1250.31,8.96 cw(c-1236.63,8.96) R81.2@-1246.3,18.63 ; R81.2@-1250.31,36.08 ccw(c-1236.63,36.08) R81.2@-1246.3,26.41 ; R81.2@-1250.31,36.08 ccw(c-1236.63,36.08) R81.2@-1246.3,26.41 ; R81.2@-1250.31,36.08 ccw(c-1236.63,36.08) R81.2@-1246.3,26.41 ; R81.2@-1250.31,88.96 cw(c-1236.63,88.96) R81.2@-1246.3,98.63 ; R81.2@-1250.31,88.96 cw(c-1236.63,88.96) R81.2@-1246.3,98.63 ; R81.2@-1250.31,88.96 cw(c-1236.63,88.96) R81.2@-1246.3,98.63 ; -1250.31,116.08 ccw(c-1236.63,116.08) R81.2@-1246.3,106.41 ; -1250.31,116.08 ccw(c-1236.63,116.08) R81.2@-1246.3,106.41 ; -1250.31,116.08 ccw(c-1236.63,116.08) R81.2@-1246.3,106.41
  Bottom Layer w10: v1(-665.19,-17.48) -665.19,-1282.48 -560.19,-1387.48 9.81,-1387.48 59.81,-1437.48 P1.5@59.81,-1517.48 ; P1.5@38.29,-1495.96 ccw(c-13.66,-1444.01) 59.81,-1444.01 ccw(c133.28,-1444.01) P1.5@81.33,-1495.96 ; P1.5@45.36,-1503.03 ccw(c10.48,-1468.15) 59.81,-1468.15 ccw(c109.14,-1468.15) P1.5@74.26,-1503.03 ; v1@-669.08,-21.37 cw(c-678.47,-30.76) -665.19,-30.76 ; v1@-669.08,-21.37 cw(c-678.47,-30.76) -665.19,-30.76 ; v1@-669.08,-21.37 cw(c-678.47,-30.76) -665.19,-30.76 ; -665.19,-30.76 cw(c-651.91,-30.76) v1@-661.3,-21.37 ; -665.19,-30.76 cw(c-651.91,-30.76) v1@-661.3,-21.37 ; -665.19,-30.76 cw(c-651.91,-30.76) v1@-661.3,-21.37
  other v1: -1250.19,22.52 -1250.19,102.52
SIGNAL6: C27.1 P1.6 R9.2 R10.2 | length 3251.5
  Top Layer w10: C27.1@-585.19,262.52 -585.19,192.52 -550.31,157.64 R9.2@-550.31,62.52 ; C27.1@-592.26,255.45 cw(c-609.33,238.38) -585.19,238.38 ; C27.1@-592.26,255.45 cw(c-609.33,238.38) -585.19,238.38 ; C27.1@-592.26,255.45 cw(c-609.33,238.38) -585.19,238.38 ; -585.19,238.38 cw(c-561.05,238.38) C27.1@-578.12,255.45 ; -585.19,238.38 cw(c-561.05,238.38) C27.1@-578.12,255.45 ; -585.19,238.38 cw(c-561.05,238.38) C27.1@-578.12,255.45 ; R9.2@-554.08,98.63 cw(c-563.18,89.53) R9.2@-550.31,89.53 ; R9.2@-554.08,98.63 cw(c-563.18,89.53) R9.2@-550.31,89.53 ; R9.2@-554.08,98.63 cw(c-563.18,89.53) R9.2@-550.31,89.53 ; R9.2@-554.08,106.41 ccw(c-563.18,115.51) R9.2@-550.31,115.51 ; R9.2@-554.08,106.41 ccw(c-563.18,115.51) R9.2@-550.31,115.51 ; R9.2@-554.08,106.41 ccw(c-563.18,115.51) R9.2@-550.31,115.51 ; R9.2@-550.31,88.96 cw(c-536.63,88.96) R9.2@-546.3,98.63 ; R9.2@-550.31,88.96 cw(c-536.63,88.96) R9.2@-546.3,98.63 ; R9.2@-550.31,88.96 cw(c-536.63,88.96) R9.2@-546.3,98.63 ; -550.31,116.08 ccw(c-536.63,116.08) R9.2@-546.3,106.41 ; -550.31,116.08 ccw(c-536.63,116.08) R9.2@-546.3,106.41 ; -550.31,116.08 ccw(c-536.63,116.08) R9.2@-546.3,106.41
  Bottom Layer w10: R10.2@-569.04,22.13 cw(c-614.27,-23.1) -550.31,-23.1 cw(c-486.35,-23.1) R10.2@-531.57,22.13 ; R10.2@-562.89,30.42 ccw(c-555.79,35.78) R10.2@-552.33,27.59 ; R10.2@-561.97,29.2 cw(c-590.13,1.04) -550.31,1.04 cw(c-510.49,1.04) R10.2@-538.65,29.2 ; R10.2@-552.41,17.49 cw(c-558.36,3.98) -544.47,-1.02 ; R10.2@-551.82,17.27 cw(c-553.56,11.69) R10.2@-547.9,10.2 ; R10.2@-550.31,62.52 -550.31,-137.6 -625.19,-212.48 -625.19,-1247.48 -545.19,-1327.48 34.81,-1327.48 159.81,-1452.48 ; R10.2@-548.38,26.64 cw(c-554.03,13.81) -540.84,9.07 ; R10.2@-548.06,27.59 ccw(c-544.69,35.6) R10.2@-537.78,30.35 ; P1.6@140.32,-1494.11 ccw(c105.62,-1452.48) 159.81,-1452.48 ; P1.6@146.72,-1501.79 ccw(c123.42,-1473.84) 159.81,-1473.84 ccw(c196.19,-1473.84) P1.6@172.89,-1501.79 ; P1.6@159.81,-1517.48 159.81,-1452.48 ; P1.6@179.3,-1494.11 cw(c214,-1452.48) 159.81,-1452.48 ; R10.2@-554.08,18.63 cw(c-563.18,9.53) R10.2@-550.31,9.53 ; R10.2@-554.08,18.63 cw(c-563.18,9.53) R10.2@-550.31,9.53 ; R10.2@-554.08,18.63 cw(c-563.18,9.53) R10.2@-550.31,9.53 ; R10.2@-554.08,26.41 ccw(c-563.18,35.51) R10.2@-550.31,35.51 ; R10.2@-554.08,26.41 ccw(c-563.18,35.51) R10.2@-550.31,35.51 ; R10.2@-554.08,26.41 ccw(c-563.18,35.51) R10.2@-550.31,35.51 ; -550.31,8.96 cw(c-536.63,8.96) R10.2@-546.3,18.63 ; -550.31,8.96 cw(c-536.63,8.96) R10.2@-546.3,18.63 ; -550.31,8.96 cw(c-536.63,8.96) R10.2@-546.3,18.63 ; R10.2@-550.31,36.08 ccw(c-536.63,36.08) R10.2@-546.3,26.41 ; R10.2@-550.31,36.08 ccw(c-536.63,36.08) R10.2@-546.3,26.41 ; R10.2@-550.31,36.08 ccw(c-536.63,36.08) R10.2@-546.3,26.41
  other v1: -550.19,22.52 -550.19,102.52
SIGNAL7: C58.1 P1.7 R31.2 R32.2 | length 4949.7
  Top Layer w10: C58.1@-1290.19,1472.52 -1290.19,1417.52 -1255.31,1382.64 R31.2@-1255.31,1282.52 -1255.31,1202.64 -1205.19,1152.52 v1(-85.19,1152.52) ; v1@-89.08,1148.63 ccw(c-98.47,1139.24) -98.47,1152.52 ccw(c-98.47,1165.8) v1@-89.08,1156.41 ; C58.1@-1297.26,1465.45 cw(c-1314.33,1448.38) -1290.19,1448.38 ; C58.1@-1297.26,1465.45 cw(c-1314.33,1448.38) -1290.19,1448.38 ; C58.1@-1297.26,1465.45 cw(c-1314.33,1448.38) -1290.19,1448.38 ; -1290.19,1448.38 cw(c-1266.05,1448.38) C58.1@-1283.12,1465.45 ; -1290.19,1448.38 cw(c-1266.05,1448.38) C58.1@-1283.12,1465.45 ; -1290.19,1448.38 cw(c-1266.05,1448.38) C58.1@-1283.12,1465.45 ; R31.2@-1259.08,1238.63 cw(c-1268.18,1229.53) R31.2@-1255.31,1229.53 ; R31.2@-1259.08,1238.63 cw(c-1268.18,1229.53) R31.2@-1255.31,1229.53 ; R31.2@-1259.08,1238.63 cw(c-1268.18,1229.53) R31.2@-1255.31,1229.53 ; R31.2@-1259.08,1246.41 ccw(c-1268.18,1255.51) R31.2@-1255.31,1255.51 ; R31.2@-1259.08,1246.41 ccw(c-1268.18,1255.51) R31.2@-1255.31,1255.51 ; R31.2@-1259.08,1246.41 ccw(c-1268.18,1255.51) R31.2@-1255.31,1255.51 ; R31.2@-1259.08,1318.63 cw(c-1268.18,1309.53) R31.2@-1255.31,1309.53 ; R31.2@-1259.08,1318.63 cw(c-1268.18,1309.53) R31.2@-1255.31,1309.53 ; R31.2@-1259.08,1318.63 cw(c-1268.18,1309.53) R31.2@-1255.31,1309.53 ; R31.2@-1259.08,1326.41 ccw(c-1268.18,1335.51) R31.2@-1255.31,1335.51 ; R31.2@-1259.08,1326.41 ccw(c-1268.18,1335.51) R31.2@-1255.31,1335.51 ; R31.2@-1259.08,1326.41 ccw(c-1268.18,1335.51) R31.2@-1255.31,1335.51 ; -1255.31,1228.96 cw(c-1241.63,1228.96) R31.2@-1251.3,1238.63 ; -1255.31,1228.96 cw(c-1241.63,1228.96) R31.2@-1251.3,1238.63 ; -1255.31,1228.96 cw(c-1241.63,1228.96) R31.2@-1251.3,1238.63 ; R31.2@-1255.31,1256.08 ccw(c-1241.63,1256.08) R31.2@-1251.3,1246.41 ; R31.2@-1255.31,1256.08 ccw(c-1241.63,1256.08) R31.2@-1251.3,1246.41 ; R31.2@-1255.31,1256.08 ccw(c-1241.63,1256.08) R31.2@-1251.3,1246.41 ; R31.2@-1255.31,1308.96 cw(c-1241.63,1308.96) R31.2@-1251.3,1318.63 ; R31.2@-1255.31,1308.96 cw(c-1241.63,1308.96) R31.2@-1251.3,1318.63 ; R31.2@-1255.31,1308.96 cw(c-1241.63,1308.96) R31.2@-1251.3,1318.63 ; -1255.31,1336.08 ccw(c-1241.63,1336.08) R31.2@-1251.3,1326.41 ; -1255.31,1336.08 ccw(c-1241.63,1336.08) R31.2@-1251.3,1326.41 ; -1255.31,1336.08 ccw(c-1241.63,1336.08) R31.2@-1251.3,1326.41
  Bottom Layer w10: v1(-85.19,1152.52) 34.81,1032.52 34.81,354.81 -120,200 -120,-105 34.81,-259.81 34.81,-1247.48 259.81,-1472.48 ; P1.7@259.81,-1517.48 259.81,-1472.48 ; v1@-85.19,1147.02 cw(c-85.19,1133.74) -75.8,1143.13 ; v1@-85.19,1147.02 cw(c-85.19,1133.74) -75.8,1143.13 ; v1@-85.19,1147.02 cw(c-85.19,1133.74) -75.8,1143.13 ; v1@-79.69,1152.52 ccw(c-66.41,1152.52) -75.8,1143.13 ; v1@-79.69,1152.52 ccw(c-66.41,1152.52) -75.8,1143.13 ; v1@-79.69,1152.52 ccw(c-66.41,1152.52) -75.8,1143.13 ; 259.81,-1472.48 cw(c241.76,-1472.48) 248.48,-1489.24 ccw(c241.76,-1472.48) 259.81,-1472.48 ; 259.81,-1472.48 ccw(c277.86,-1472.48) 271.14,-1489.24 cw(c277.86,-1472.48) 259.81,-1472.48
  other v1: -1255.19,1242.52 -1255.19,1322.52
SIGNAL8: C90.1 P1.8 R52.2 R53.2 | length 4566.1
  Top Layer w10: C90.1@-595.19,1472.52 -595.19,1417.52 -555.31,1377.64 R52.2@-555.31,1277.52 -555.31,1202.64 -530.19,1177.52 v1(-40.19,1177.52) ; C90.1@-602.26,1465.45 cw(c-619.33,1448.38) -595.19,1448.38 ; C90.1@-602.26,1465.45 cw(c-619.33,1448.38) -595.19,1448.38 ; C90.1@-602.26,1465.45 cw(c-619.33,1448.38) -595.19,1448.38 ; -595.19,1448.38 cw(c-571.05,1448.38) C90.1@-588.12,1465.45 ; -595.19,1448.38 cw(c-571.05,1448.38) C90.1@-588.12,1465.45 ; -595.19,1448.38 cw(c-571.05,1448.38) C90.1@-588.12,1465.45 ; R52.2@-559.08,1233.63 cw(c-568.18,1224.53) R52.2@-555.31,1224.53 ; R52.2@-559.08,1233.63 cw(c-568.18,1224.53) R52.2@-555.31,1224.53 ; R52.2@-559.08,1233.63 cw(c-568.18,1224.53) R52.2@-555.31,1224.53 ; R52.2@-559.08,1241.41 ccw(c-568.18,1250.51) R52.2@-555.31,1250.51 ; R52.2@-559.08,1241.41 ccw(c-568.18,1250.51) R52.2@-555.31,1250.51 ; R52.2@-559.08,1241.41 ccw(c-568.18,1250.51) R52.2@-555.31,1250.51 ; R52.2@-559.08,1313.63 cw(c-568.18,1304.53) R52.2@-555.31,1304.53 ; R52.2@-559.08,1313.63 cw(c-568.18,1304.53) R52.2@-555.31,1304.53 ; R52.2@-559.08,1313.63 cw(c-568.18,1304.53) R52.2@-555.31,1304.53 ; R52.2@-559.08,1321.41 ccw(c-568.18,1330.51) R52.2@-555.31,1330.51 ; R52.2@-559.08,1321.41 ccw(c-568.18,1330.51) R52.2@-555.31,1330.51 ; R52.2@-559.08,1321.41 ccw(c-568.18,1330.51) R52.2@-555.31,1330.51 ; -555.31,1223.96 cw(c-541.63,1223.96) R52.2@-551.3,1233.63 ; -555.31,1223.96 cw(c-541.63,1223.96) R52.2@-551.3,1233.63 ; -555.31,1223.96 cw(c-541.63,1223.96) R52.2@-551.3,1233.63 ; R52.2@-555.31,1251.08 ccw(c-541.63,1251.08) R52.2@-551.3,1241.41 ; R52.2@-555.31,1251.08 ccw(c-541.63,1251.08) R52.2@-551.3,1241.41 ; R52.2@-555.31,1251.08 ccw(c-541.63,1251.08) R52.2@-551.3,1241.41 ; R52.2@-555.31,1303.96 cw(c-541.63,1303.96) R52.2@-551.3,1313.63 ; R52.2@-555.31,1303.96 cw(c-541.63,1303.96) R52.2@-551.3,1313.63 ; R52.2@-555.31,1303.96 cw(c-541.63,1303.96) R52.2@-551.3,1313.63 ; -555.31,1331.08 ccw(c-541.63,1331.08) R52.2@-551.3,1321.41 ; -555.31,1331.08 ccw(c-541.63,1331.08) R52.2@-551.3,1321.41 ; -555.31,1331.08 ccw(c-541.63,1331.08) R52.2@-551.3,1321.41 ; -53.47,1177.52 cw(c-53.47,1164.24) v1@-44.08,1173.63 ; -53.47,1177.52 ccw(c-53.47,1190.8) v1@-44.08,1181.41 ; -53.47,1177.52 cw(c-53.47,1164.24) v1@-44.08,1173.63 ; -53.47,1177.52 ccw(c-53.47,1190.8) v1@-44.08,1181.41 ; -53.47,1177.52 ccw(c-53.47,1190.8) v1@-44.08,1181.41 ; -53.47,1177.52 cw(c-53.47,1164.24) v1@-44.08,1173.63
  Bottom Layer w10: v1(-40.19,1177.52) 79.81,1057.52 79.81,344.62 -72.79,192.02 -72.79,-82.4 79.81,-235 79.81,-1222.48 169.81,-1312.48 314.81,-1312.48 359.81,-1357.48 P1.8@359.81,-1517.48 ; P1.8@338.29,-1495.96 ccw(c286.34,-1444.01) 359.81,-1444.01 ccw(c433.28,-1444.01) P1.8@381.33,-1495.96 ; P1.8@345.36,-1503.03 ccw(c310.48,-1468.15) 359.81,-1468.15 ccw(c409.14,-1468.15) P1.8@374.26,-1503.03 ; v1@-40.19,1172.02 cw(c-40.19,1158.74) -30.8,1168.13 ; v1@-40.19,1172.02 cw(c-40.19,1158.74) -30.8,1168.13 ; v1@-40.19,1172.02 cw(c-40.19,1158.74) -30.8,1168.13 ; v1@-34.69,1177.52 ccw(c-21.41,1177.52) -30.8,1168.13 ; v1@-34.69,1177.52 ccw(c-21.41,1177.52) -30.8,1168.13 ; v1@-34.69,1177.52 ccw(c-21.41,1177.52) -30.8,1168.13
  other v1: -555.19,1237.52 -555.19,1317.52
SIM_CLK: U36.J2-13 U37.3 | length 2310.8
  Top Layer w10: U36.J2-13@4114.81,692.52 v2@5649.15,692.52
  Bottom Layer w10: U37.3@5644.8,1380.98 cw(c5627.06,1363.24) 5652.15,1363.24 ; v2@5648.61,698.06 ccw(c5640.08,706.59) 5652.15,706.59 ccw(c5664.22,706.59) v2@5655.69,698.06 ; v2@5652.15,695.52 5652.15,1411.95 U37.3@5652.4,1412.2 ; 5652.15,1362.03 cw(c5678.96,1362.03) U37.3@5660,1380.98
  other v2: 5652.15,694.52
SIM_DATA: U36.J2-14 U37.7 | length 2377.1
  Top Layer w7: U36.J2-14@4114.81,592.52 5600.15,592.52 v2@5602.15,594.52
  Bottom Layer w7: U37.7@5593.74,1379.92 cw(c5573.44,1359.62) 5602.15,1359.62 ; v2@5597.55,598.12 ccw(c5586.46,609.21) 5602.15,609.21 ccw(c5617.84,609.21) v2@5606.75,598.12 ; v2@5602.15,594.52 5602.15,1411.95 U37.7@5602.4,1412.2 ; 5602.15,1358.4 cw(c5632.58,1358.4) U37.7@5611.06,1379.92
  other v2: 5602.15,593.52
SIM_GND: U36.J2-12 U37.5 | length 2386.4
  Top Layer w7: U36.J2-12@4114.81,792.52 5727.15,792.52 v2(5810.15,875.52)
  Bottom Layer w7: U37.5@5793.74,1379.92 cw(c5754.13,1340.31) 5810.15,1340.31 ; U37.5@5798.69,1384.87 cw(c5771.03,1357.21) 5810.15,1357.21 ; U37.5@5802.4,1412.2 5810.15,1404.46 v2(5810.15,875.52) ; U37.5@5803.64,1389.82 cw(c5787.93,1374.11) U37.5@5810.15,1374.11 ; v2@5805.55,880.12 ccw(c5794.46,891.21) 5810.15,891.21 ccw(c5825.84,891.21) v2@5814.75,880.12
SIM_IN: R109.2 U37.6 | length 222.9
  Bottom Layer w7: U37.6@5693.74,1379.92 cw(c5672.83,1359.01) 5702.4,1359.01 cw(c5731.97,1359.01) U37.6@5711.06,1379.92 ; R109.2@5697.02,1300.65 ccw(c5684.02,1313.65) 5702.4,1313.65 ; R109.2@5702.4,1295.27 U37.6@5702.4,1412.2 ; 5702.4,1310.02 ccw(c5722.65,1310.02) R109.2@5708.33,1295.7 ; 5702.4,1326.92 ccw(c5739.55,1326.92) R109.2@5713.28,1300.65
SIM_RST: U36.J1-14 U37.2 | length 2704
  Top Layer w7: U36.J1-14@4014.81,592.52 4063.81,543.52 5746.15,543.52 v2@5751.15,538.52
  Bottom Layer w7: U37.2@5743.74,1379.92 cw(c5725.85,1362.04) 5751.15,1362.04 ; v2@5746.55,545.12 ccw(c5735.46,556.21) 5751.15,556.21 ccw(c5766.84,556.21) v2@5755.75,545.12 ; v2@5751.15,538.52 5751.15,1410.95 U37.2@5752.4,1412.2 ; 5751.15,1355.99 cw(c5784.99,1355.99) U37.2@5761.06,1379.92
  other v2: 5751.15,540.52
SIM_VCC: U36.J2-15 U37.1 | length 2704.5
  Top Layer w10: U36.J2-15@4114.81,492.52 5831.15,492.52 v2(5832.15,493.52)
  Bottom Layer w10: v2(5832.15,493.52) 5852.4,513.77 U37.1@5852.4,1412.2 ; v2@5832.15,498.52 ccw(c5832.15,510.59) 5840.69,502.06 ccw(c5849.22,493.52) v2@5837.15,493.52 ; U37.1@5844.8,1380.98 cw(c5826.45,1362.63) 5852.4,1362.63 cw(c5878.35,1362.63) U37.1@5860,1380.98
SPI1_MISO: P102.71 U34.22 | length 483.3
  Top Layer w7: P102.71@1499.45,2081.9 cw(c1488.62,2071.07) 1503.94,2071.07 cw(c1519.26,2071.07) P102.71@1508.43,2081.9 ; P102.71@1503.94,2115.91 1503.94,2046.73 1710.02,1840.65 U34.22@1710.02,1742.02
SPI1_MOSI: P102.69 U34.23 | length 488.2
  Top Layer w7: P102.69@1467.95,2081.9 cw(c1457.12,2071.07) 1472.44,2071.07 cw(c1487.76,2071.07) P102.69@1476.93,2081.9 ; P102.69@1472.44,2115.91 1472.44,2048.23 1690.34,1830.33 U34.23@1690.34,1742.02
SPI1_NSS: P102.75 U34.20 | length 473.5
  Top Layer w7: P102.75@1562.44,2081.9 cw(c1551.61,2071.07) 1566.93,2071.07 cw(c1582.25,2071.07) P102.75@1571.42,2081.9 ; P102.75@1566.93,2115.91 1566.93,2063.74 1749.39,1881.28 U34.20@1749.39,1742.02
SPI1_SCK: P102.73 U34.21 | length 478.4
  Top Layer w7: P102.73@1530.94,2081.9 cw(c1520.11,2071.07) 1535.43,2071.07 cw(c1550.75,2071.07) P102.73@1539.92,2081.9 ; P102.73@1535.43,2115.91 1535.43,2055.24 1729.71,1860.96 U34.21@1729.71,1742.02
SPI2_MISO: P102.49 U34.35 | length 701.4
  Top Layer w7: P102.49@1152.99,2081.9 cw(c1142.16,2071.07) 1157.48,2071.07 cw(c1172.8,2071.07) P102.49@1161.97,2081.9 ; P102.49@1157.48,2115.91 1157.48,1788.19 1313.88,1631.79 U34.35@1442.31,1631.79
SPI2_MOSI: P102.47 U34.36 | length 743.1
  Top Layer w7: P102.47@1121.5,2081.9 cw(c1110.67,2071.07) 1125.99,2071.07 cw(c1141.31,2071.07) P102.47@1130.48,2081.9 ; P102.47@1125.99,2115.91 1125.99,1784.68 1298.57,1612.1 U34.36@1442.31,1612.1
SPI2_NSS: P102.53 U34.33 | length 606.3
  Top Layer w7: P102.53@1215.98,2081.9 cw(c1205.15,2071.07) 1220.47,2071.07 cw(c1235.79,2071.07) P102.53@1224.96,2081.9 ; P102.53@1220.47,2115.91 1220.47,1815.2 1364.51,1671.16 U34.33@1442.31,1671.16
SPI2_SCK: P102.51 U34.34 | length 653.8
  Top Layer w7: P102.51@1184.49,2081.9 cw(c1173.66,2071.07) 1188.98,2071.07 cw(c1204.3,2071.07) P102.51@1193.47,2081.9 ; P102.51@1188.98,2115.91 1188.98,1801.69 1339.2,1651.47 U34.34@1442.31,1651.47
SWCLK: P4.3 U34.49 | length 1729.6
  Top Layer w7: U34.49@1513.17,1305.02 1513.17,1214.5 v2(1514.15,1213.52)
  Bottom Layer w7: v2@1514.15,1207.02 cw(c1514.15,1191.33) 1525.25,1202.42 cw(c1536.34,1213.52) v2@1520.65,1213.52 ; v2(1514.15,1213.52) 1543.15,1184.52 1853.15,1184.52 1902.15,1233.52 2158.52,1233.52 2425,1500 2680,1500 ; 2689.59,1509.59 ccw(c2647.35,1551.83) P4.3@2706.24,1561.82 ; 2699.17,1519.17 ccw(c2663.73,1554.61) P4.3@2713.14,1562.99 ; P4.3@2699.34,1560.65 cw(c2630.96,1549.05) 2680,1500 ; 2708.75,1528.75 ccw(c2680.12,1557.39) P4.3@2720.04,1564.16 ; 2714.71,1534.71 cw(c2725,1524.42) P4.3@2725,1538.97 ; P4.3@2725,1565 2725,1545 2680,1500
SWDIO: P4.2 U34.46 | length 1908.2
  Top Layer w7: U34.46@1442.31,1415.25 1485.42,1415.25 1504.15,1396.52 1504.15,1358.52 1466.15,1320.52 1466.15,1214.52 v2(1464.15,1212.52)
  Bottom Layer w7: v2@1464.15,1206.02 cw(c1464.15,1190.33) 1475.25,1201.42 cw(c1486.34,1212.52) v2@1470.65,1212.52 ; v2(1464.15,1212.52) 1515.15,1161.52 1866.15,1161.52 1913.15,1208.52 2168.52,1208.52 2440,1480 2780,1480 2825,1525 ; P4.2@2814.46,1541.2 cw(c2807.28,1525) 2825,1525 ; P4.2@2825,1565 2825,1525 ; P4.2@2835.54,1541.2 ccw(c2842.72,1525) 2825,1525
SYS_RESET_INN: C5.1 DD1.1 P101.6 SW1.1 SW1.2 | length 3148.2
  Top Layer w7: v2@432.69,345.4 cw(c421.6,334.31) 437.29,334.31 cw(c452.98,334.31) v2@441.89,345.4 ; v2(437.29,350) 437.29,330 464.57,302.72 P101.6@464.57,254.13 ; P101.6@460.08,288.14 ccw(c449.25,298.97) 464.57,298.97 ccw(c479.89,298.97) P101.6@469.06,288.14 ; v2(1305,345) 1305,532.71 1522.29,750 2225,750 2267.29,792.29 2267.29,815 2278.31,826.02 DD1.1@2314.77,826.02 2314.77,842.02 2325.27,852.52 C5.1@2394.77,852.52 2499.81,852.52 2531.27,883.98 SW1.1@2531.27,951.02 SW1.2@2889.27,951.02
  Bottom Layer w7: v2@432.69,354.6 ccw(c421.6,365.69) 437.29,365.69 ccw(c452.98,365.69) v2@441.89,354.6 ; v2(437.29,350) 437.29,385 457.29,405 505,405 565,345 v2(1305,345) ; v2@1300.4,340.4 ccw(c1289.31,329.31) 1289.31,345 ccw(c1289.31,360.69) v2@1300.4,349.6
UART1_RX: R167.2 R168.2 U34.43 | length 601.2
  Top Layer w7: R168.2@1065,1160 R167.2@1125,1160 1125,1265 1175,1315 1245,1315 1305,1375 1305,1430 1349.31,1474.31 U34.43@1442.31,1474.31
UART1_TX: R165.2 R166.2 U34.42 | length 749.9
  Top Layer w7: R166.2@945,1160 R165.2@1005,1160 1005,1305 1055,1355 1240,1355 1270,1385 1270,1435 1328.99,1493.99 U34.42@1442.31,1493.99
UART2_RX: U34.17 U36.J1-4 | length 2269.1
  Top Layer w7: U34.17@1808.45,1742.02 3646.65,1742.02 3797.15,1591.52 4013.81,1591.52 U36.J1-4@4014.81,1592.52
UART2_RXD: J1.2 U33.13 | length 815.1
  Top Layer w7: U33.13@4499.06,-929.69 4452.6,-929.69 4434.81,-947.48 4434.81,-1197.48 4474.81,-1237.48 4654.81,-1237.48 4689.81,-1272.48 4689.81,-1387.48 4659.81,-1417.48 J1.2@4609.81,-1417.48
UART2_TX: U34.16 U36.J1-5 | length 2245.8
  Top Layer w7: U34.16@1879.31,1671.16 1977.79,1671.16 2021.63,1715 3604.67,1715 3827.15,1492.52 U36.J1-5@4014.81,1492.52
UART2_TXD: J1.1 U33.14 | length 650.9
  Top Layer w7: U33.14@4499.06,-904.09 4433.2,-904.09 4409.81,-927.48 4409.81,-1252.48 4474.81,-1317.48 J1.1@4609.81,-1317.48